# Allegro board 430DEBUG_ZJ_V10A.brd
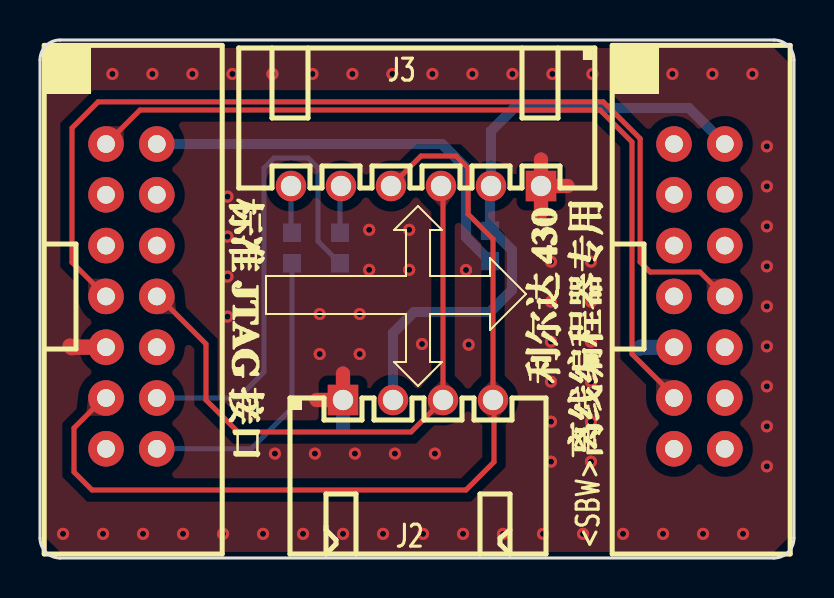
[diagram p0: board, top side]
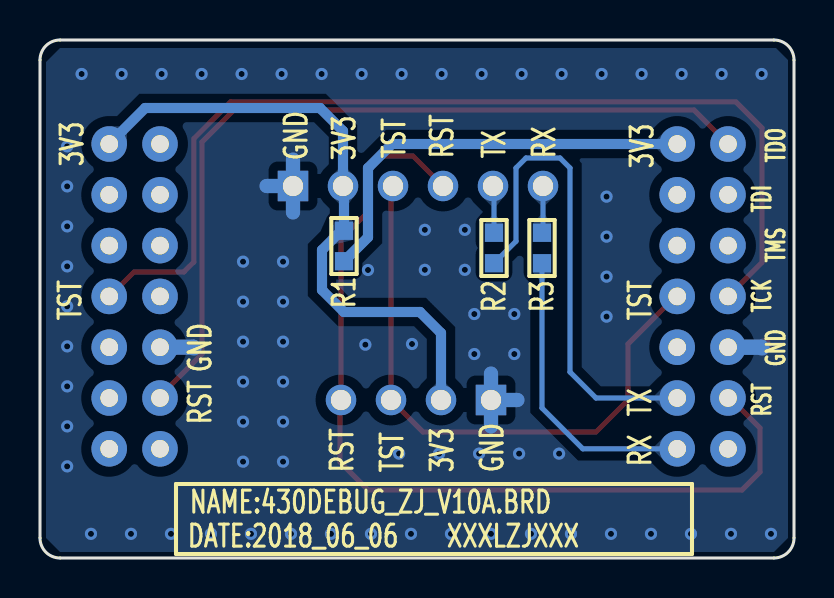
[diagram p1: board, bottom side, seen from below]

Outline 37.7 x 25.9 mm; copper layers: TOP, BOTTOM. Coordinates in mm from the lower left corner of the outline.
Outline path: 0,24.9 0,1 arc(0.29,0.29) 1,0 36.7,0 arc(37.41,0.29) 37.7,1 37.7,24.9 arc(37.41,25.61) 36.7,25.9 1,25.9 arc(0.29,25.61) 0,24.9

## Design rules (mm)
constraint set DEFAULT: min track width 0.203, pair gap 0.203

## Placement (name value [footprint] x y rotation side)
J1  HEADER7X2_2R54  [HEADER7X2_2R54_JTAG]  3.3 20.7 270 top
J2  -  [XHB-4AW]  18.9 7.9 0 top
J3  -  [XHB-6AW]  18.8 18.6 180 top
JP1  -  [JTAG]  31.7 20.7 270 top
NOREF  -  []  0 0 0 top
NOREF#2  -  []  0 0 90 top
R1  0R/NI  [RC0603]  22.5 15.6 90 bottom
R2  0R/NI  [RC0603]  15 15.5 90 bottom
R3  0R/NI  [RC0603]  12.6 15.5 90 bottom

## Library data of the parts
J1 JP1 = JTAG
J2 = CONN RCPT 4
J3 = CONN RCPT 6
R1-R3 = R_Generic

## Footprints (pads in the part's own frame, mm; a bottom-side part is the same pattern mirrored in y, then rotated)
HEADER7X2_2R54_JTAG
  round 1.778 hole 0.889: 1(0,0) 2(0,2.54) 3(2.54,0) 4(2.54,2.54) 5(5.08,0) 6(5.08,2.54) 7(7.62,0) 8(7.62,2.54) 9(10.16,0) 10(10.16,2.54) 11(12.7,0) 12(12.7,2.54) 13(15.24,0) 14(15.24,2.54)
JTAG
  round 1.778 hole 0.889: 1(0,0) 2(0,2.54) 3(2.54,0) 4(2.54,2.54) 5(5.08,0) 6(5.08,2.54) 7(7.62,0) 8(7.62,2.54) 9(10.16,0) 10(10.16,2.54) 11(12.7,0) 12(12.7,2.54) 13(15.24,0) 14(15.24,2.54)
RC0603
  rect 0.914x0.914 smd: 1(-0.762,0) 2(0.762,0)
XHB-4AW
  rect 1.524x1.524 hole 1.016: 1(-3.75,0)
  round 1.524 hole 1.016: 2(-1.25,0) 3(1.25,0) 4(3.75,0)
XHB-6AW
  rect 1.524x1.524 hole 1.016: 1(-6.25,0)
  round 1.524 hole 1.016: 2(-3.75,0) 3(-1.25,0) 4(1.25,0) 5(3.75,0) 6(6.25,0)

## Nets
GND: J1.9 J2.1 J3.1 JP1.9
VCC_3.3V: J1.2 R1.1
VCC_TOOL: J2.2 J3.2 JP1.2 R1.2
JTAG_TCK: J1.7 JP1.8
JTAG_TDI: J1.3
JTAG_TDO: J1.1 JP1.11
JTAG_TMS: J1.5
MCU_RXD: J3.6 R3.2
MCU_TXD: J3.5 R2.2
RESET: J1.11 J2.4 J3.4
T_RXD: J1.14 R3.1
T_TXD: J1.12 R2.1
TEST: J1.8 J2.3 J3.3

Pads without a net: J1 4 6 10 13; JP1 1 3 4 5 6 7 10 12 13 14

## Via types
v1: diameter 0.61, hole 0.305, TOP to BOTTOM, 77 vias

## Routing (per net, layer and track width the routed paths; a pad name or vN(x,y) marks a point on that pad's centre or on a via; arc(x,y) is an arc through that point)
GND: length 19.8
  TOP w0.711: J3.1 25.05,19.92 ; J3.1 26.37,18.6 ; J3.1 25.05,17.28 ; 15.15,9.22 J2.1 13.83,7.9
  TOP w0.762: 1.5,10.6 1.56,10.54 J1.9
  BOTTOM w0.711: J3.1 25.05,19.92 ; J3.1 25.05,17.28 ; J3.1 26.37,18.6 ; 13.83,7.9 J2.1 ; J2.1 15.15,9.22 ; J2.1 15.15,6.58
  BOTTOM w0.762: 30,10.5 30.04,10.54 JP1.9 ; J1.9 1.64,10.54 1.6,10.5
  vias: v1(1.15,1.21) v1(1.62,24.2) v1(3.15,1.21) v1(3.62,24.2) v1(5.15,1.21) v1(5.62,24.2) v1(7.15,1.21) v1(7.62,24.2) v1(9.15,1.21) v1(9.37,18.07) v1(9.37,16.07) v1(9.37,14.07) v1(9.37,12.07) v1(9.62,24.2) v1(11.15,1.21) v1(11.62,24.2) v1(11.75,5.22) v1(13.15,1.21) v1(13.62,24.2) v1(13.75,5.22) v1(13.99,12.2) v1(13.99,10.2) v1(15.15,1.21) v1(15.62,24.2) v1(15.75,5.22) v1(15.99,12.2) v1(15.99,10.2) v1(16.46,16.41) v1(16.46,14.41) v1(17.15,1.21) v1(17.62,24.2) v1(17.75,5.22) v1(18.46,16.41) v1(18.46,14.41) v1(19.1,10.7) v1(19.15,1.21) v1(19.62,24.2) v1(19.75,5.22) v1(21.15,1.21) v1(21.3,14.4) v1(21.43,10.67) v1(21.62,24.2) v1(23.15,1.21) v1(23.62,24.2) v1(25.15,1.21) v1(25.55,14.82) v1(25.55,12.82) v1(25.55,10.82) v1(25.55,8.82) v1(25.55,6.82) v1(25.55,4.82) v1(25.62,24.2) v1(27.15,1.21) v1(27.55,14.82) v1(27.55,12.82) v1(27.55,10.82) v1(27.55,8.82) v1(27.55,6.82) v1(27.55,4.82) v1(27.62,24.2) v1(29.15,1.21) v1(29.62,24.2) v1(31.15,1.21) v1(31.62,24.2) v1(33.15,1.21) v1(33.62,24.2) v1(35.15,1.21) v1(35.62,24.2) v1(36.34,20.58) v1(36.34,18.58) v1(36.34,16.58) v1(36.34,14.58) v1(36.34,12.58) v1(36.34,10.58) v1(36.34,8.58) v1(36.34,6.58) v1(36.34,4.58)
VCC_3.3V: length 21.1
  BOTTOM w0.508: R1.1 21.3,16.04 21.3,19.5 20.1,20.7 J1.2
VCC_TOOL: length 31.6
  BOTTOM w0.508: JP1.2 32.44,22.5 23.7,22.5 22.55,21.35 J3.2 22.5,18.55 R1.2 22.64,16.36 23.6,15.4 23.6,13.4 22.5,12.3 18.7,12.3 17.65,11.25 J2.2
JTAG_TCK: length 49.9
  TOP w0.254: J1.7 1.6,14.78 1.6,21.5 2.91,22.81 28.17,22.81 30.01,20.97 30.01,14.8 30.51,14.3 33,14.3 34.22,13.08 JP1.8
JTAG_TDO: length 41.3
  TOP w0.254: J1.1 5,22.4 28,22.4 29.6,20.8 29.6,10.2 31.7,8.1 JP1.11
MCU_RXD: length 2.4
  BOTTOM w0.254: R3.2 12.55,16.31 J3.6
MCU_TXD: length 2.4
  BOTTOM w0.254: R2.2 15,18.55 J3.5
RESET: length 46.3
  TOP w0.254: J1.11 3.2,8 1.7,6.5 1.7,4.3 2.6,3.4 21.3,3.4 22.7,4.8 22.7,7.85 J2.4 22.65,15.95 21.4,17.2 21.4,19.5 20.8,20.1 19.05,20.1 J3.4
T_RXD: length 14.8
  BOTTOM w0.254: J1.14 10.56,5.46 12.6,7.5 R3.1
T_TXD: length 24.4
  BOTTOM w0.254: J1.12 9.9,8 11.2,9.3 11.2,19.5 11.7,20 13.4,20 13.9,19.5 13.9,15.84 R2.1
TEST: length 30.2
  TOP w0.254: J3.3 20.15,18.5 J2.3 18.55,6.3 9.9,6.3 8.3,7.9 8.3,10.7 5.92,13.08 J1.8

## Copper pours and planes (outline as drawn; the poured copper is in the pictures)
GND on TOP: 0.3,24.9 0.3,1 1,0.3 36.7,0.3 37.4,1 37.4,24.8 36.7,25.5 0.9,25.5 ; 13 cut-outs
GND on BOTTOM: 0.3,24.9 0.3,1 1,0.3 36.7,0.3 37.4,1 37.4,24.8 36.7,25.5 0.9,25.5 ; 15 cut-outs

Small or netless copper shapes (teardrops, artwork), in the pictures only: 12 on TOP, 14 on BOTTOM

## Text on the board
Ref Des/Silkscreen Bottom: TDO | TMS | GND | TDI | TCK | RST | NAME:430DEBUG_ZJ_V10A.BRD | DATE:2018_06_06    XXXLZJXXX | 3V3 | TST | TX | RX
Ref Des/Silkscreen Top: <SBW>
NCLEGEND-1-2: FIGURE | FINISHED_SIZE | 0.3048 | 0.889 | 1.016 | DRILL CHART: TOP to BOTTOM | ALL UNITS ARE IN MILLIMETERS | PLATED | QTY | 77 | 28 | 10
